# EAGLE board v001 (EAGLE 6.4)
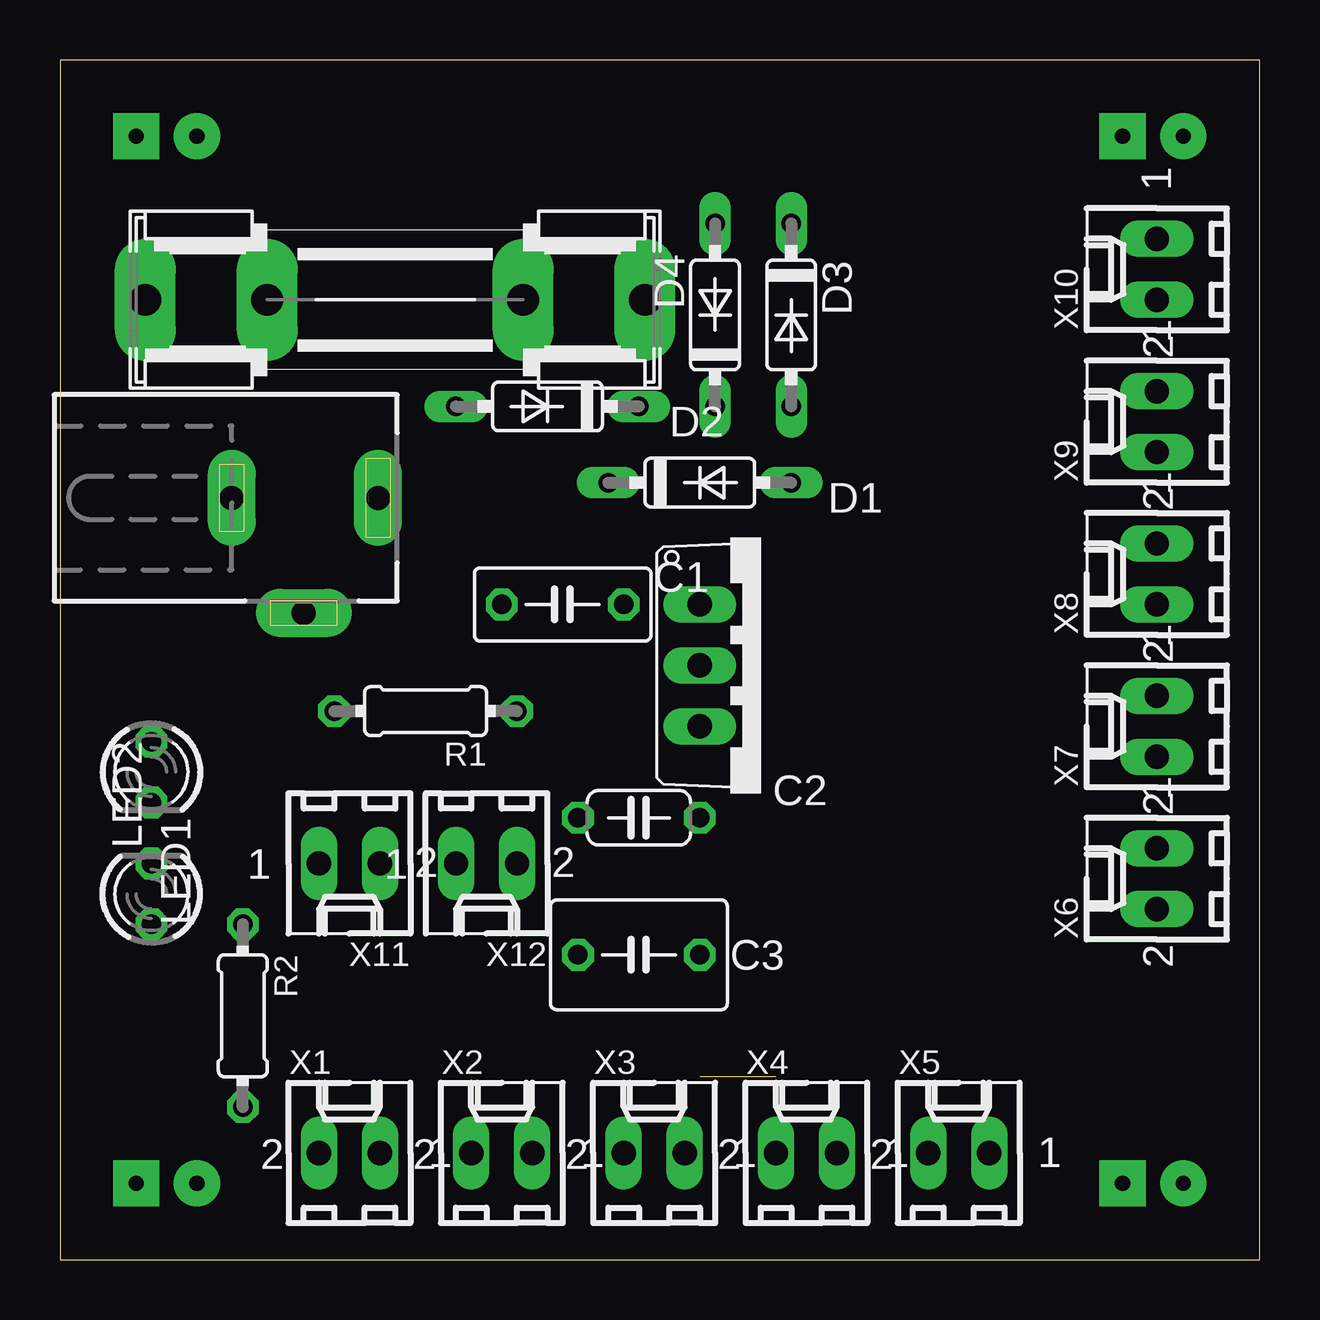
[diagram p0: board, top side]
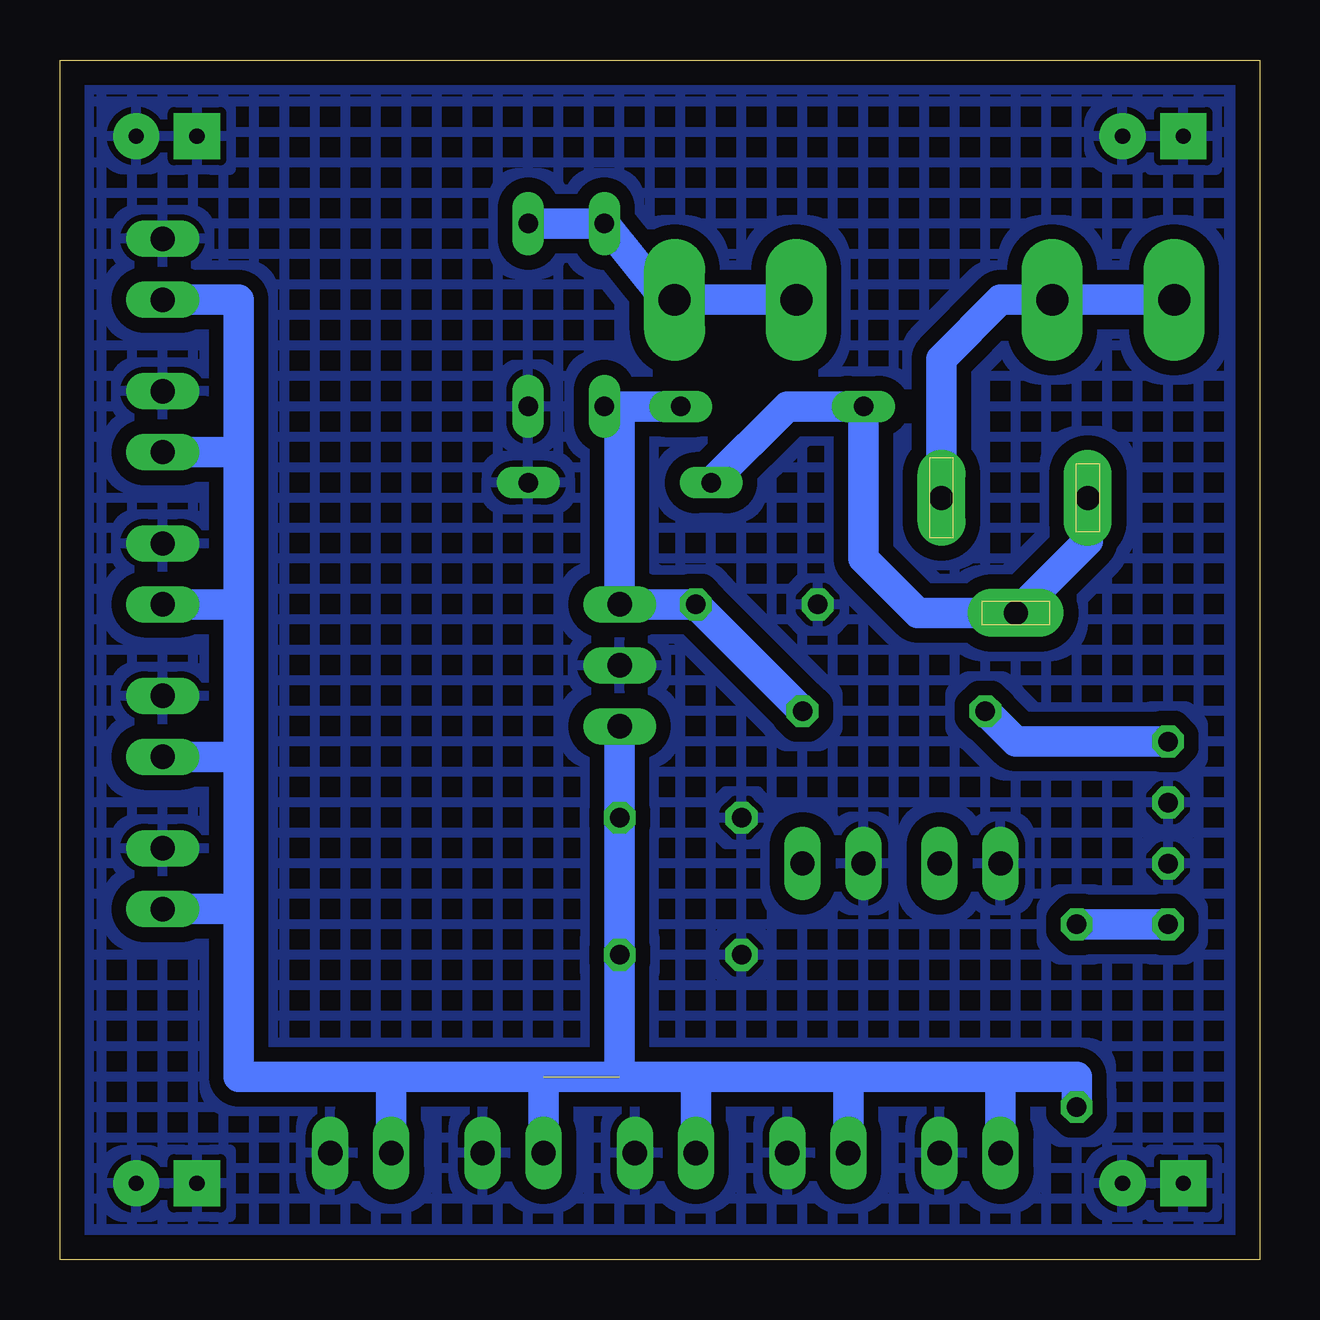
[diagram p1: board, bottom side, seen from below]

Size 50 x 50 mm. Coordinates in mm from the lower left corner, seen from the top.
Outline: 0,0 50,0 50,50 0,50 0,0
Copper layers (1*16): Top 0.035mm / dielectric 1.5mm / Bottom 0.035mm
Design rules "default": minimum track width 10mil, minimum drill 24mil, track to track 8mil, track to pad 8mil, pad to pad 8mil, via to via 8mil, smd to smd 8mil, copper to edge 40mil, drill to drill 8mil, minimum pad ring 10mil, minimum via ring 8mil, stop-mask expansion 4mil, vias tented up to drill 0mil, thermal gap 10mil

## Footprints (pad centres in the part's own frame; a part is rotated, then mirrored left to right if it is on the bottom)
C050-030X075 = drill 0.813 octagon: 1 -2.54,0; 2 2.54,0
C050-024X044 = drill 0.813 octagon: 1 -2.54,0; 2 2.54,0
C050-045X075 = drill 0.813 octagon: 1 -2.54,0; 2 2.54,0
DO35-7 = drill 0.813 long: A 3.81,0; C -3.81,0
SHK20L = drill 1.321 pad 2.54 long: 1A -10.414,0; 1B -5.334,0; 2A 10.414,0; 2B 5.334,0
TO220V = drill 1.016 long: 1 -2.54,-2.54; 2 0,-2.54; 3 2.54,-2.54
DCJ0202 = drill 1 pad 2 long: 1 0,3.1; 2 4.8,0; 3 0,-3
LED3MM = drill 0.813 octagon: A -1.27,0; K 1.27,0
PCB_05X05 = drill 0.64 pad 1.93 square: GND@1 3.175,46.825; GND@2 44.285,46.825; GND@7 3.175,3.175; GND@8 44.285,3.175 | drill 0.64 pad 1.93: GND@3 46.825,46.825; GND@4 5.715,46.825; GND@5 46.825,3.175; GND@6 5.715,3.175
0204/7 = drill 0.813 octagon: 1 -3.81,0; 2 3.81,0
6410-02 = drill 1.016 long: 1 1.27,0; 2 -1.27,0

## Placement (x,y rotation side)
C1  0.33uF  [C050-030X075]  20.95,27.3 180 top
C2  0.1uF  [C050-024X044]  24.13,18.41 180 top
C3  1uF  [C050-045X075]  24.13,12.7 180 top
D1  1N4004  [DO35-7]  26.67,32.38 0 top
D2  1N4004  [DO35-7]  20.32,35.56 180 top
D3  1N4004  [DO35-7]  30.48,39.37 270 top
D4  1N4004  [DO35-7]  27.3,39.37 90 top
F1  1A  [SHK20L]  13.97,40.01 0 top
IC1  7805TV  [TO220V]  29.21,24.77 270 top
J1  9VDC  [DCJ0202]  10.16,31.75 270 top
LED1  GREEN  [LED3MM]  3.81,20.32 270 top
LED2  GREEN  [LED3MM]  3.81,15.24 90 top
PCB1  PCB05X05  [PCB_05X05]  0,0 0 top
R1  470R  [0204/7]  15.24,22.86 180 top
R2  470R  [0204/7]  7.62,10.16 270 top
X1  Out-A  [6410-02]  12.06,4.45 0 top
X2  Out-B  [6410-02]  18.41,4.45 0 top
X3  Out-C  [6410-02]  24.77,4.45 0 top
X4  Out-D  [6410-02]  31.11,4.45 0 top
X5  Out-E  [6410-02]  37.47,4.45 0 top
X6  Out-F  [6410-02]  45.72,15.88 90 top
X7  Out-G  [6410-02]  45.72,22.23 90 top
X8  Out-H  [6410-02]  45.72,28.57 90 top
X9  Out-I  [6410-02]  45.72,34.92 90 top
X10  Out-J  [6410-02]  45.72,41.27 90 top
X11  Cross  [6410-02]  12.06,16.51 180 top
X12  Cross  [6410-02]  17.78,16.51 180 top

## Library data of the parts
C1-C3 R1 R2 = rcl
D1-D4 = diode
F1 = fuse; OC_FARNELL: unknown; OC_NEWARK: unknown
IC1 = linear
J1 = con-jack; OC_FARNELL: unknown; OC_NEWARK: unknown
LED1 LED2 = led
PCB1 = GNLib
X1-X12 = con-molex; OC_FARNELL: unknown; OC_NEWARK: unknown

## Nets
+5V: C2.1 C3.1 IC1.3 R2.2 X1.2 X2.2 X3.2 X4.2 X5.2 X6.2 X7.2 X8.2 X9.2 X10.2
GND: C1.2 C2.2 C3.2 D1.A D3.A IC1.2 LED1.K LED2.K PCB1.GND@1 PCB1.GND@2 PCB1.GND@3 PCB1.GND@4 PCB1.GND@5 PCB1.GND@6 PCB1.GND@7 PCB1.GND@8 X1.1 X2.1 X3.1 X4.1 X5.1 X6.1 X7.1 X8.1 X9.1 X10.1 X11.1 X12.1
N$1: C1.1 D2.C D4.C IC1.1 R1.1
N$3: LED1.A R1.2
N$4: F1.1A J1.1
N$5: LED2.A R2.1
N$7: D1.C D2.A J1.2 J1.3
N$8: D3.C D4.A F1.2A

## Tracks (layer width: path | path; a pad name or v marks a point on that pad's centre or on a via)
+5V  (1 unrouted)
  Bottom 1.27: IC1.3 C2.1 C3.1 26.67,7.62 | 17.14,7.62 10.79,7.62 | X1.2 10.79,7.62 | X2.2 17.14,7.62 | X3.2 23.5,7.62 | 23.5,7.62 17.14,7.62 | 10.79,7.62 7.62,7.62 R2.2 | X4.2 29.84,7.62 | 29.84,7.62 23.5,7.62 | 42.55,14.61 42.55,20.95 | 42.55,20.95 42.55,27.3 | 42.55,27.3 42.55,33.66 | 42.55,33.66 42.55,40.01 X10.2 | X9.2 42.55,33.66 | X8.2 42.55,27.3 | X7.2 42.55,20.95 | X6.2 42.55,14.61 | X5.2 36.2,7.62 | 36.2,7.62 42.55,7.62 42.55,14.61 | 29.84,7.62 36.2,7.62
GND
  pour Bottom (isolate 0.61, hatched): 0,0 0,50 50,50 50,0
N$1
  Bottom 1.27: D4.C 26.67,35.56 | 26.67,35.56 D2.C | 26.67,35.56 IC1.1 C1.1 R1.1
N$3
  Bottom 1.27: R1.2 10.16,21.59 LED1.A
N$4
  Bottom 1.27: F1.1A 10.79,40.01 13.26,37.54 J1.1
N$5
  Bottom 1.27: R2.1 LED2.A
N$7
  Bottom 1.27: J1.3 7.16,29.95 J1.2 14.25,26.95 16.51,29.21 D2.A 19.68,35.56 D1.C
N$8
  Bottom 1.27: 19.05,40.01 F1.2A 24.77,40.01 D4.A D3.C